# EAGLE board CT_schematic (EAGLE 7.6.0)

Size 100 x 80 mm. Coordinates in mm from the lower left corner, seen from the top.
Outline: 0,0 100,0 100,80 0,80 0,0
Copper layers (1*16): Top 0.035mm / dielectric 1.5mm / Bottom 0.035mm
Design rules "default": minimum track width 10mil, minimum drill 24mil, track to track 8mil, track to pad 8mil, pad to pad 8mil, via to via 8mil, smd to smd 8mil, copper to edge 40mil, drill to drill 8mil, minimum pad ring 10mil, minimum via ring 8mil, stop-mask expansion 4mil, vias tented up to drill 0mil, thermal gap 10mil

## Footprints (pad centres in the part's own frame; a part is rotated, then mirrored left to right if it is on the bottom)
C0603 = smd 0.8 x 0.8: 1 -0.762,0; 2 0.762,0
C0402 = smd 0.5 x 0.5: 1 -0.508,0; 2 0.508,0
C1210 = smd 1.2 x 2.5: 1 -1.524,0; 2 1.524,0
C1206 = smd 1.3 x 1.6: 1 -1.524,0; 2 1.524,0
L0603 = smd 0.8 x 0.8: 1 -0.762,0; 2 0.762,0
R0603 = smd 0.8 x 0.8: 1 -0.762,0; 2 0.762,0
LQFP48 = smd 0.3 x 1.2: 1 -2.75,-4.25; 2 -2.25,-4.25; 3 -1.75,-4.25; 4 -1.25,-4.25; 5 -0.75,-4.25; 6 -0.25,-4.25; 7 0.25,-4.25; 8 0.75,-4.25; 9 1.25,-4.25; 10 1.75,-4.25; 11 2.25,-4.25; 12 2.75,-4.25; 25 2.75,4.25; 26 2.25,4.25; 27 1.75,4.25; 28 1.25,4.25; 29 0.75,4.25; 30 0.25,4.25; 31 -0.25,4.25; 32 -0.75,4.25; 33 -1.25,4.25; 34 -1.75,4.25; 35 -2.25,4.25; 36 -2.75,4.25 | smd 1.2 x 0.3: 13 4.25,-2.75; 14 4.25,-2.25; 15 4.25,-1.75; 16 4.25,-1.25; 17 4.25,-0.75; 18 4.25,-0.25; 19 4.25,0.25; 20 4.25,0.75; 21 4.25,1.25; 22 4.25,1.75; 23 4.25,2.25; 24 4.25,2.75; 37 -4.25,2.75; 38 -4.25,2.25; 39 -4.25,1.75; 40 -4.25,1.25; 41 -4.25,0.75; 42 -4.25,0.25; 43 -4.25,-0.25; 44 -4.25,-0.75; 45 -4.25,-1.25; 46 -4.25,-1.75; 47 -4.25,-2.25; 48 -4.25,-2.75
TST-110-05-T-D-RA = drill 1 pad 1.7 square: 1 0,0 | drill 1 pad 1.7: 2 0,2.54; 3 2.54,0; 4 2.54,2.54; 5 5.08,0; 6 5.08,2.54; 7 7.62,0; 8 7.62,2.54; 9 10.16,0; 10 10.16,2.54; 11 12.7,0; 12 12.7,2.54; 13 15.24,0; 14 15.24,2.54; 15 17.78,0; 16 17.78,2.54; 17 20.32,0; 18 20.32,2.54; 19 22.86,0; 20 22.86,2.54
TDFN-8/6MM = smd 0.3 x 0.75: 1 0,0; 2 0.5,0; 3 1,0; 4 1.5,0; 5 1.5,3; 6 1,3; 7 0.5,3; 8 0,3
FCI_10118193-0001LF = smd 0.4 x 1.35: 1 -1.3,2.675; 2 -0.65,2.675; 3 0,2.675; 4 0.65,2.675; 5 1.3,2.675 | smd 1.6 x 1.4: 6 -3.2,2.45; 7 3.2,2.45 | smd 1.9 x 1.9: 8 -1.2,0; 9 1.2,0 | hole 0.5: -3.3,0; 3.3,0
SOT143B = smd 1 x 0.7: 1 -0.75,-1 | smd 0.6 x 0.7: 2 0.95,-1; 3 0.95,1; 4 -0.95,1
ABS07-32.768KHZ-7-T = smd 1.1 x 2.4: 1 -2.5,0; 2 0,0
ASFL1 = smd 1.7 x 1.5: 1 -1.27,-1.1; 2 1.27,-1.1; 3 1.27,1.1; 4 -1.27,1.1
SOIC-8_EP = smd 1.6 x 0.533: 1 -2.921,1.905; 2 -2.921,0.635; 3 -2.921,-0.635; 4 -2.921,-1.905; 5 2.921,-1.905; 6 2.921,-0.635; 7 2.921,0.635; 8 2.921,1.905 | smd 2.54 x 3.302: EPAD 0,0 | drill 0.406 pad 0.406: P$1 -0.508,0.635; P$2 0.381,0.635; P$3 -0.508,-0.635; P$4 0.381,-0.635
DFN8_2X3MC = smd 0.813 x 0.305: 1 -1.398,0.75; 2 -1.398,0.25; 3 -1.398,-0.25; 4 -1.398,-0.75; 5 1.398,-0.75; 6 1.398,-0.25; 7 1.398,0.25; 8 1.398,0.75 | smd 1.753 x 1.549: 9 0,0
JST-2-SMD = smd 1 x 4.6: 1 -1,-3.7; 2 1,-3.7 | smd 1.6 x 3.4: NC1 -3.4,1.5; NC2 3.4,1.5
SON-6 = smd 0.55 x 0.3: 1 -0.355,0.5 | smd 0.52 x 0.3: 2 -0.37,0; 3 -0.37,-0.5; 4 0.37,-0.5; 5 0.37,0; 6 0.37,0.5
SW_4-1437565-2 = smd 1.4 x 2.1: 1 -2.23,4.55; 2 -2.23,-4.55; 3 2.23,4.55; 4 2.23,-4.55
LGM67K-G1J2-24-Z = smd 0.8 x 1.4: A -2,0; C 0,0
NC7SZ125M5X = smd 1.3 x 0.7: 1 -1.3,0.95; 2 -1.3,0; 3 -1.3,-0.95; 4 1.3,-0.95; 5 1.3,0.95

## Placement (x,y rotation side)
C1  1e-07  [C0603]  -19.05,53.34 0 top  (outside the outline)
C2  1e-07  [C0603]  -22.86,53.34 0 top  (outside the outline)
C3  1e-07  [C0603]  -26.67,53.34 0 top  (outside the outline)
C4  1e-07  [C0603]  -30.48,53.34 0 top  (outside the outline)
C5  4.7e-06  [C0603]  -15.24,53.34 0 top  (outside the outline)
C6  1e-08  [C0603]  -34.29,53.34 0 top  (outside the outline)
C7  1e-06  [C0603]  -38.1,53.34 0 top  (outside the outline)
C8  1e-07  [C0603]  -41.91,53.34 0 top  (outside the outline)
C9  1e-11  [C0402]  -38.1,58.42 0 top  (outside the outline)
C10  1e-11  [C0402]  -41.91,58.42 0 top  (outside the outline)
C11  1e-07  [C0402]  -45.72,58.42 0 top  (outside the outline)
C12  1e-08  [C0402]  -49.53,58.42 0 top  (outside the outline)
C13  1e-08  [C0402]  -53.34,58.42 0 top  (outside the outline)
C14  1e-08  [C0402]  -57.15,58.42 0 top  (outside the outline)
C15  1e-05  [C1210]  -57.15,35.56 0 top  (outside the outline)
C16  1e-05  [C1210]  -63.5,35.56 0 top  (outside the outline)
C17  1e-05  [C1210]  -16.51,43.18 0 top  (outside the outline)
C18  1e-05  [C1210]  -22.86,43.18 0 top  (outside the outline)
C19  1e-07  [C0402]  -60.96,58.42 0 top  (outside the outline)
C20  1e-05  [C1206]  -29.21,43.18 0 top  (outside the outline)
C21  1e-05  [C1206]  -35.56,43.18 0 top  (outside the outline)
C22  1e-08  [C0402]  -64.77,58.42 0 top  (outside the outline)
C23  1e-08  [C0402]  -15.24,63.5 0 top  (outside the outline)
F1  240.0  [L0603]  -45.72,53.34 0 top  (outside the outline)
R1  10000.0  [R0603]  -20.32,48.26 0 top  (outside the outline)
R2  1000.0  [R0603]  -49.53,53.34 0 top  (outside the outline)
R3  1600.5  [R0603]  -53.34,53.34 0 top  (outside the outline)
R4  4700.0  [R0603]  -57.15,53.34 0 top  (outside the outline)
R5  2200.0  [R0603]  -60.96,53.34 0 top  (outside the outline)
R6  2200.0  [R0603]  -15.24,58.42 0 top  (outside the outline)
R7  2200.0  [R0603]  -19.05,58.42 0 top  (outside the outline)
R8  2200.0  [R0603]  -22.86,58.42 0 top  (outside the outline)
R9  10000.0  [R0603]  -25.4,48.26 0 top  (outside the outline)
R10  10000.0  [R0603]  -30.48,48.26 0 top  (outside the outline)
R11  10000.0  [R0603]  -35.56,48.26 0 top  (outside the outline)
R12  10000.0  [R0603]  -40.64,48.26 0 top  (outside the outline)
R13  10000.0  [R0603]  -45.72,48.26 0 top  (outside the outline)
R14  4031.5447154472  [R0603]  -57.15,41.91 0 top  (outside the outline)
R15  2200.0  [R0603]  -26.67,58.42 0 top  (outside the outline)
R16  10000.0  [R0603]  -50.8,48.26 0 top  (outside the outline)
R17  10000.0  [R0603]  -55.88,48.26 0 top  (outside the outline)
R18  9100.0  [R0603]  -30.48,58.42 0 top  (outside the outline)
R19  680000.0  [R0603]  -62.23,41.91 0 top  (outside the outline)
R20  120000.0  [R0603]  -15.24,48.26 0 top  (outside the outline)
R21  2000.0  [R0603]  -34.29,58.42 0 top  (outside the outline)
R22  10000.0  [R0603]  -60.96,48.26 0 top  (outside the outline)
U1  STM32L072CBT6  [LQFP48]  -58.42,5.08 0 top  (outside the outline)
U2  TST-110-05-T-D-RA  [TST-110-05-T-D-RA]  -58.42,24.13 0 top  (outside the outline)
U3  24AA16-I/MC  [TDFN-8/6MM]  -36.83,16.51 0 top  (outside the outline)
U4  24AA64T-I/MNY  [TDFN-8/6MM]  -24.13,16.51 0 top  (outside the outline)
U5  10118193-0001LF  [FCI_10118193-0001LF]  -19.05,26.67 0 top  (outside the outline)
U6  prtr5v0u2ax  [SOT143B]  -27.94,63.5 0 top  (outside the outline)
U7  ABS07-32.768KHZ-7-T  [ABS07-32.768KHZ-7-T]  -27.94,35.56 0 top  (outside the outline)
U8  ASFL1-25MHZ-NCS  [ASFL1]  -53.34,16.51 0 top  (outside the outline)
U9  MIC5234YME  [SOIC-8_EP]  -36.83,35.56 0 top  (outside the outline)
U10  MCP73831T-2ACI/MC  [DFN8_2X3MC]  -38.1,62.23 0 top  (outside the outline)
U11  S2B-PH-SM4-TB(LF)(SN)  [JST-2-SMD]  -41.91,6.35 0 top  (outside the outline)
U12  TPS3895ADRYR  [SON-6]  -31.75,62.23 0 top  (outside the outline)
U13  4-1437565-2  [SW_4-1437565-2]  -27.94,6.35 0 top  (outside the outline)
U14  Q65110A2395  [LGM67K-G1J2-24-Z]  -45.72,35.56 0 top  (outside the outline)
U15  nc7sz125m5x  [NC7SZ125M5X]  -40.64,41.91 0 top  (outside the outline)
U16  nc7sz125m5x  [NC7SZ125M5X]  -46.99,41.91 0 top  (outside the outline)

## Library data of the parts
C1-C23 F1 R1-R22 U1-U16 = circuit_tree

## Nets
CLK_CRYSTAL_U1_3: C9.1 U1.3 U7.1
CLK_CRYSTAL_U1_4: C10.1 U1.4 U7.2
CLK_U1_5: U1.5 U8.3
GND: C1.2 C2.2 C3.2 C4.2 C5.2 C6.2 C7.2 C8.2 C9.2 C10.2 C11.2 C12.2 C13.2 C14.2 C15.2 C16.2 C17.2 C18.2 C19.2 C20.2 C21.2 C22.2 C23.2 R2.2 R9.2 R11.2 R13.2 R15.2 R18.2 R20.2 R21.2 U1.8 U1.23 U1.35 U1.47 U2.4 U2.6 U2.8 U2.10 U2.12 U2.14 U2.16 U2.18 U2.20 U3.4 U3.7 U4.4 U4.7 U5.5 U5.6 U5.7 U5.8 U5.9 U6.1 U8.2 U9.7 U9.EPAD U10.6 U10.9 U11.2 U12.2 U14.C U15.2 U15.3 U16.1 U16.3
INPUT_USBPOWER_5V: C20.1 R22.2 U5.1 U6.4 U10.1 U10.2
NET_U1_7: R4.1 U1.7 U16.4
NET_U1_9: C6.1 C7.1 F1.1 U1.9
NET_U1_21: R7.1 U1.21 U3.6
NET_U1_22: R8.1 U1.22 U3.5
NET_U1_30: R5.1 U1.30 U4.6
NET_U1_31: R6.1 U1.31 U4.5
NET_U1_44: R9.1 U1.44
NET_U1_45: R3.1 U1.45 U14.A
NET_U1_46: R1.1 U1.46 U13.3 U13.4
NET_U4_1: R11.1 U4.1
NET_U4_2: R12.1 U4.2
NET_U4_3: R13.1 U4.3
NET_U9_4: R14.2 R15.1 U9.4
NET_U10_5: R22.1 U10.5
NET_U10_8: R21.1 U10.8
NET_U12_1: R17.1 R18.1 U12.1
NET_U12_3: R19.2 R20.1 U12.3
NET_U12_4: R16.1 U12.4 U15.4 U16.2
NET_U13_1: R2.1 U13.1 U13.2
PROC_SYS_SWCLK: U1.37 U2.9
PROC_SYS_SWDIO: U1.34 U2.7
PROC_USB_DM: U1.32 U5.2 U6.3
PROC_USB_DP: U1.33 U5.3 U6.2
RST_OUT_U2_SRESET_B: R10.1 U2.15 U15.1
VCC_S1_3V7: C15.1 C16.1 C21.1 U9.5 U9.8 U10.3 U10.4 U11.1
VCC_TIER1_3V3: C1.1 C2.1 C3.1 C4.1 C5.1 C8.1 C11.1 C12.1 C13.1 C14.1 C17.1 C18.1 C19.1 C22.1 C23.1 F1.2 R1.2 R3.2 R4.2 R5.2 R6.2 R7.2 R8.2 R10.2 R12.2 R14.1 R16.2 R17.2 R19.1 U1.1 U1.24 U1.36 U1.48 U2.1 U3.8 U4.8 U8.4 U9.1 U12.6 U15.5 U16.5

## Tracks (layer width: path | path; a pad name or v marks a point on that pad's centre or on a via)
CLK_CRYSTAL_U1_3  (2 unrouted)
CLK_CRYSTAL_U1_4  (2 unrouted)
CLK_U1_5  (1 unrouted)
GND  (65 unrouted)
INPUT_USBPOWER_5V  (5 unrouted)
NET_U1_7  (2 unrouted)
NET_U1_9  (3 unrouted)
NET_U1_21  (2 unrouted)
NET_U1_22  (2 unrouted)
NET_U1_30  (2 unrouted)
NET_U1_31  (2 unrouted)
NET_U1_44  (1 unrouted)
NET_U1_45  (2 unrouted)
NET_U1_46  (3 unrouted)
NET_U4_1  (1 unrouted)
NET_U4_2  (1 unrouted)
NET_U4_3  (1 unrouted)
NET_U9_4  (2 unrouted)
NET_U10_5  (1 unrouted)
NET_U10_8  (1 unrouted)
NET_U12_1  (2 unrouted)
NET_U12_3  (2 unrouted)
NET_U12_4  (3 unrouted)
NET_U13_1  (2 unrouted)
PROC_SYS_SWCLK  (1 unrouted)
PROC_SYS_SWDIO  (1 unrouted)
PROC_USB_DM  (2 unrouted)
PROC_USB_DP  (2 unrouted)
RST_OUT_U2_SRESET_B  (2 unrouted)
VCC_S1_3V7  (7 unrouted)
VCC_TIER1_3V3  (40 unrouted)